# Altium PCB Controlador de velocidad - Placa fuente v2.PcbDoc
Units mil, origin at the board's own origin, x right, y up, seen from the top; angles counter-clockwise.
Board outline 3345 x 3030 mil, 2 copper layers (Top Layer, Bottom Layer); 32 components, 23 nets, 108 pads, 5 vias.
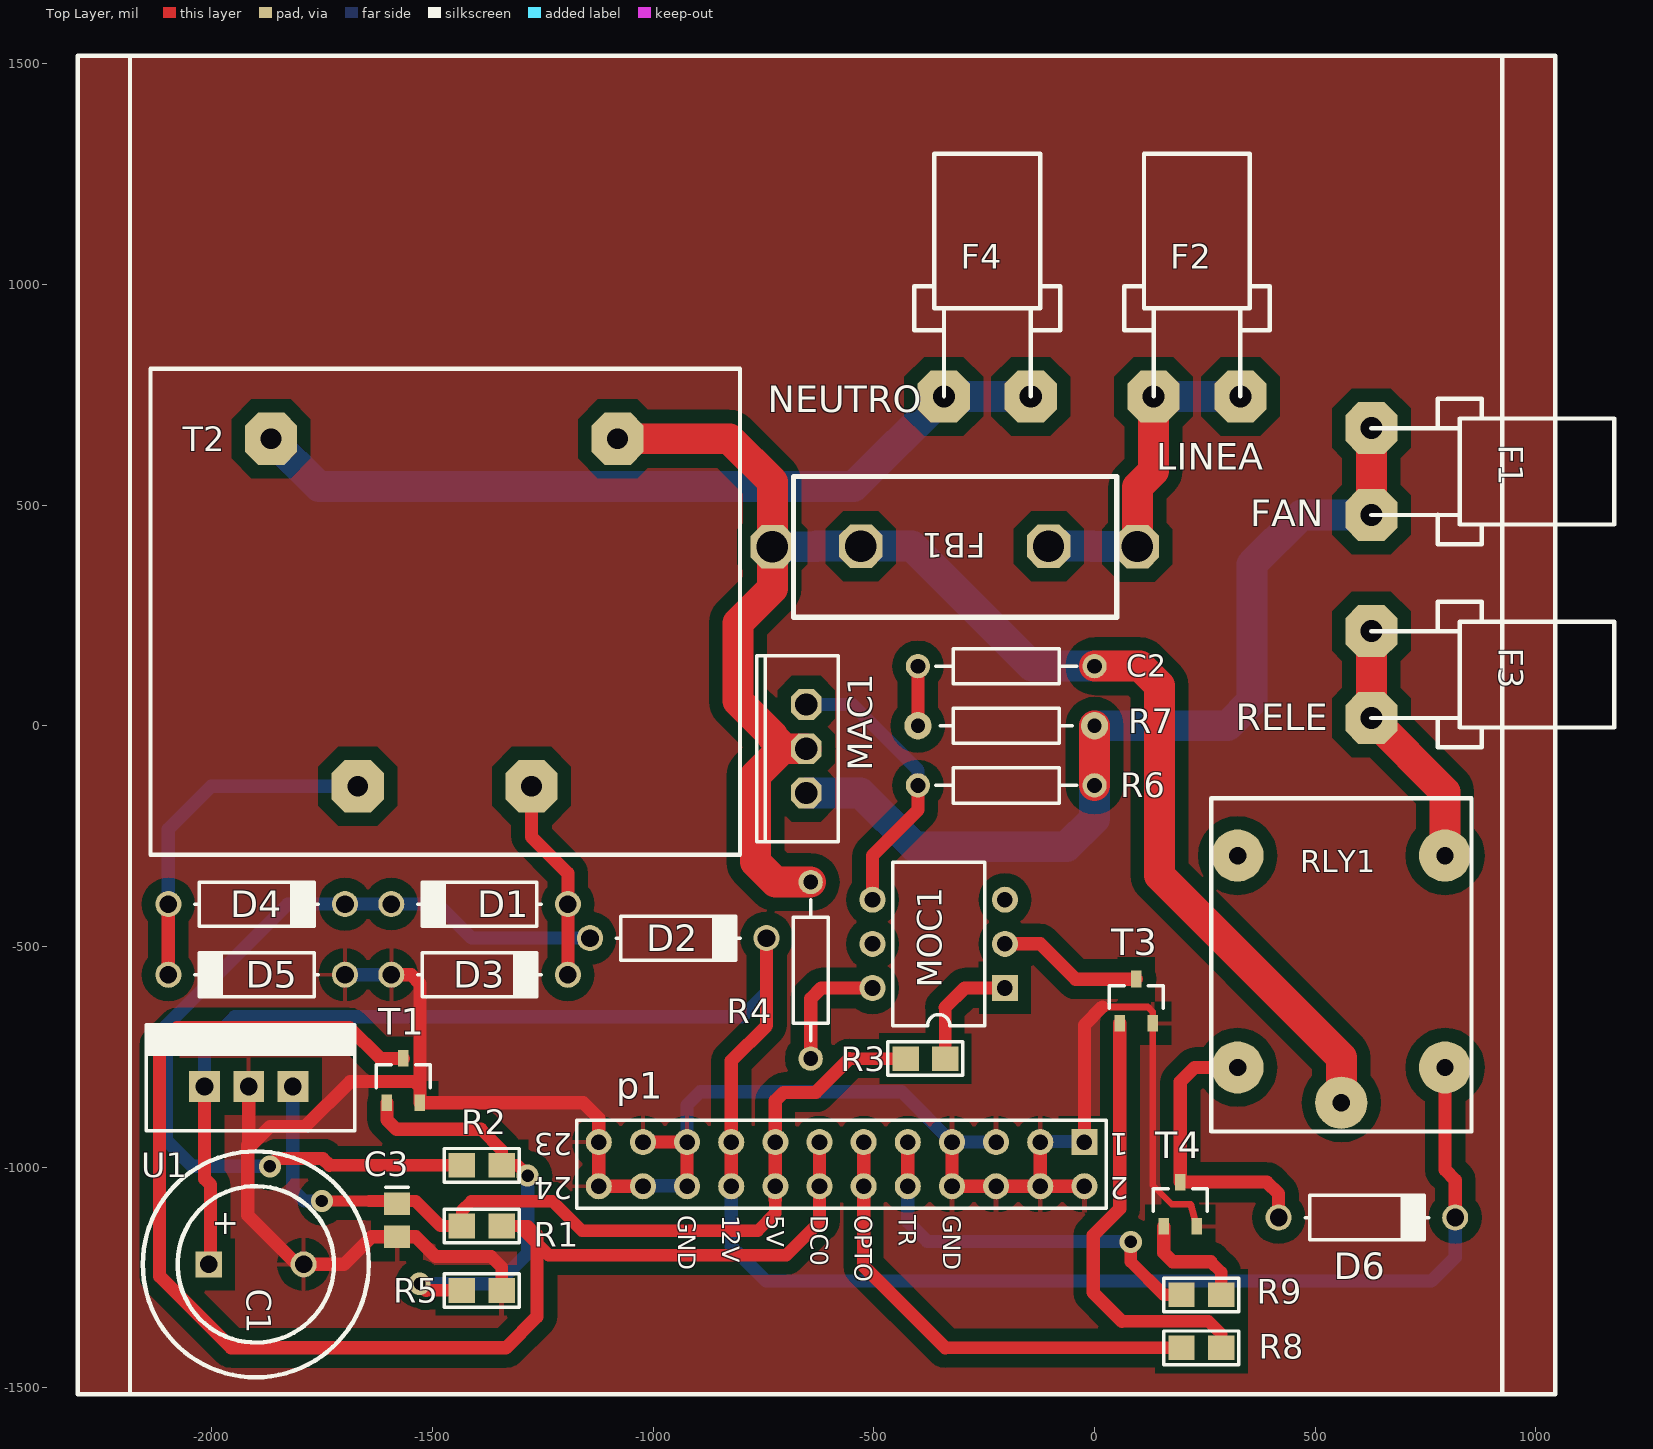
[diagram p0: Top Layer view]
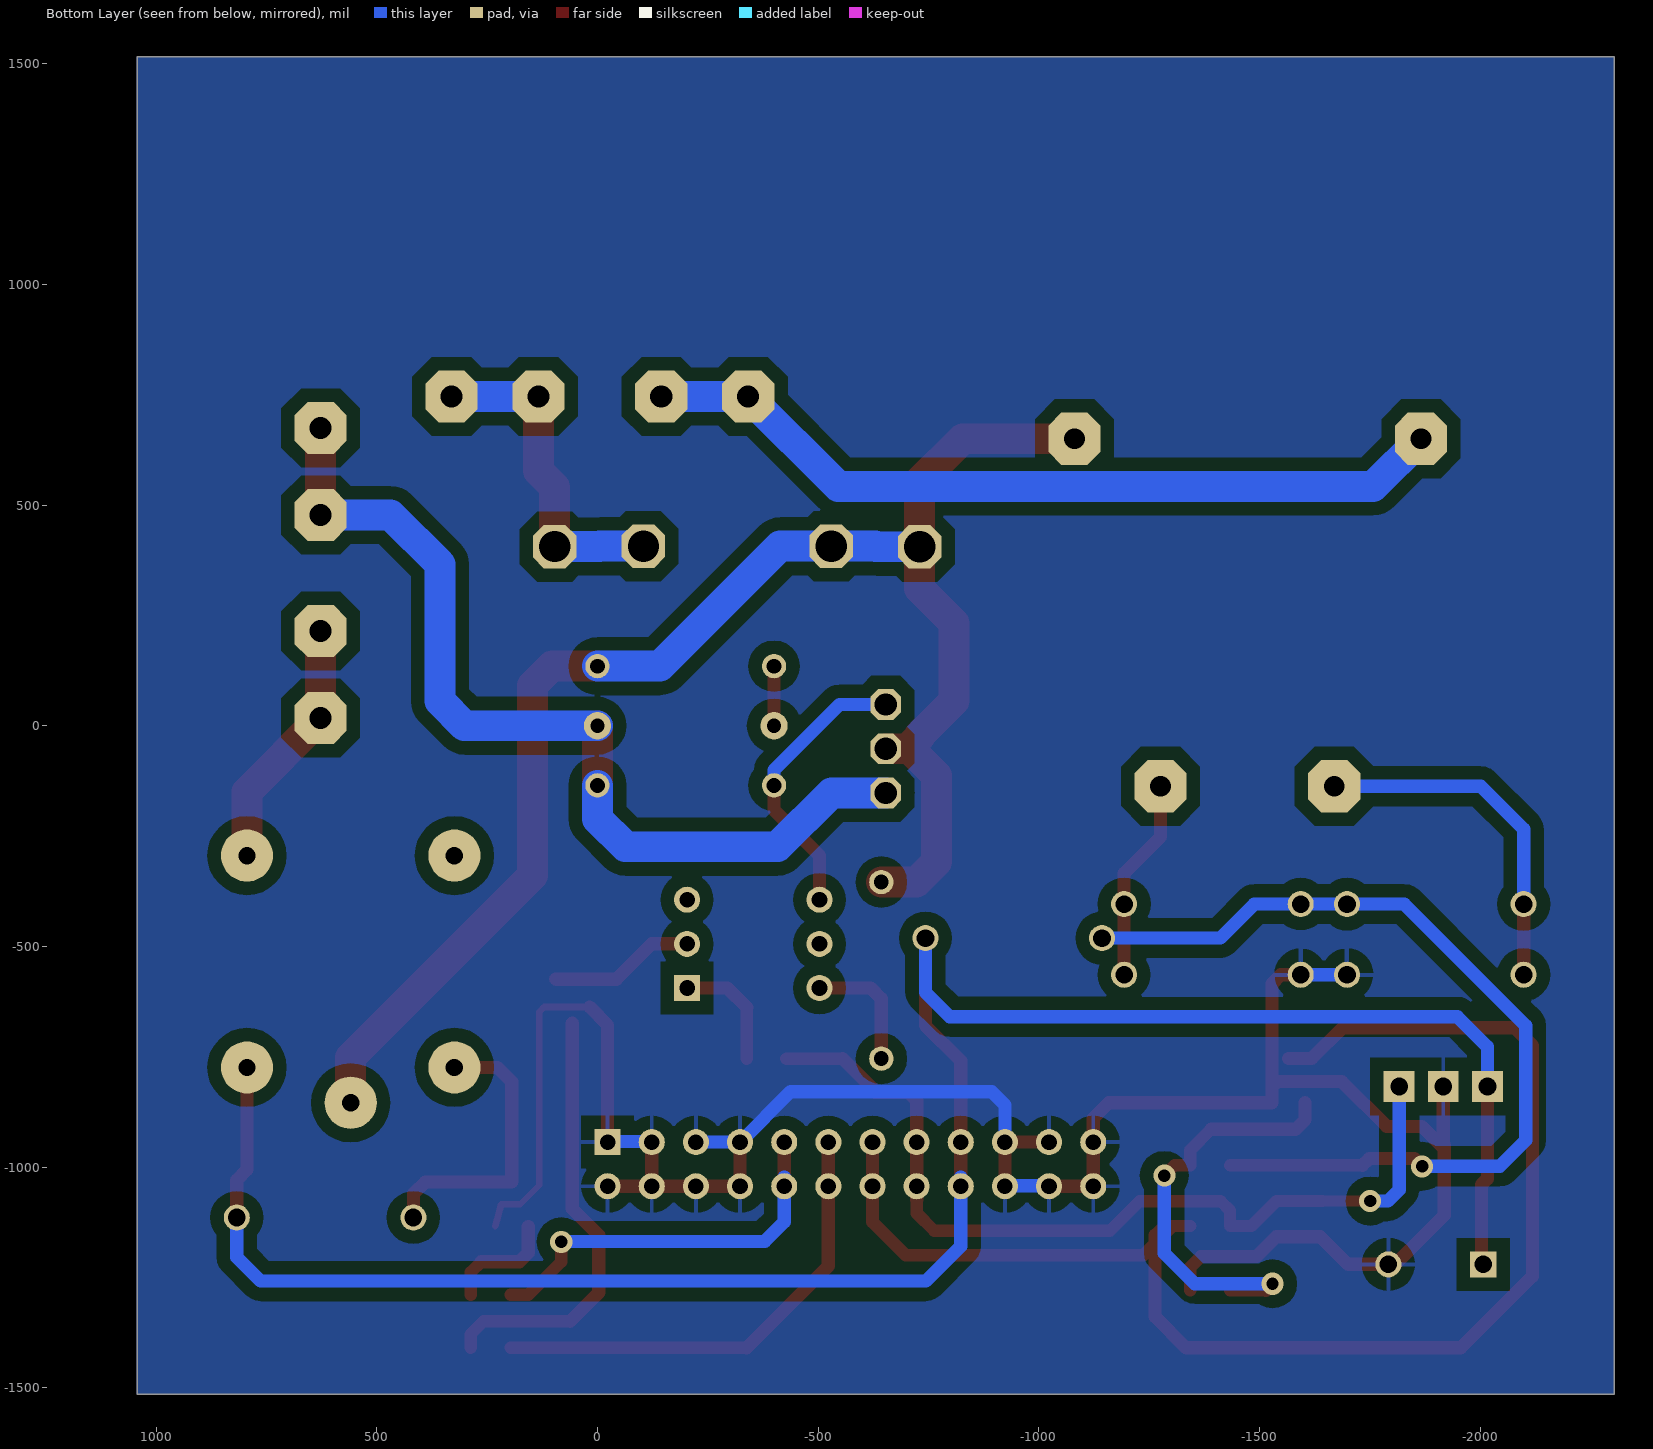
[diagram p1: Bottom Layer view, seen from below]
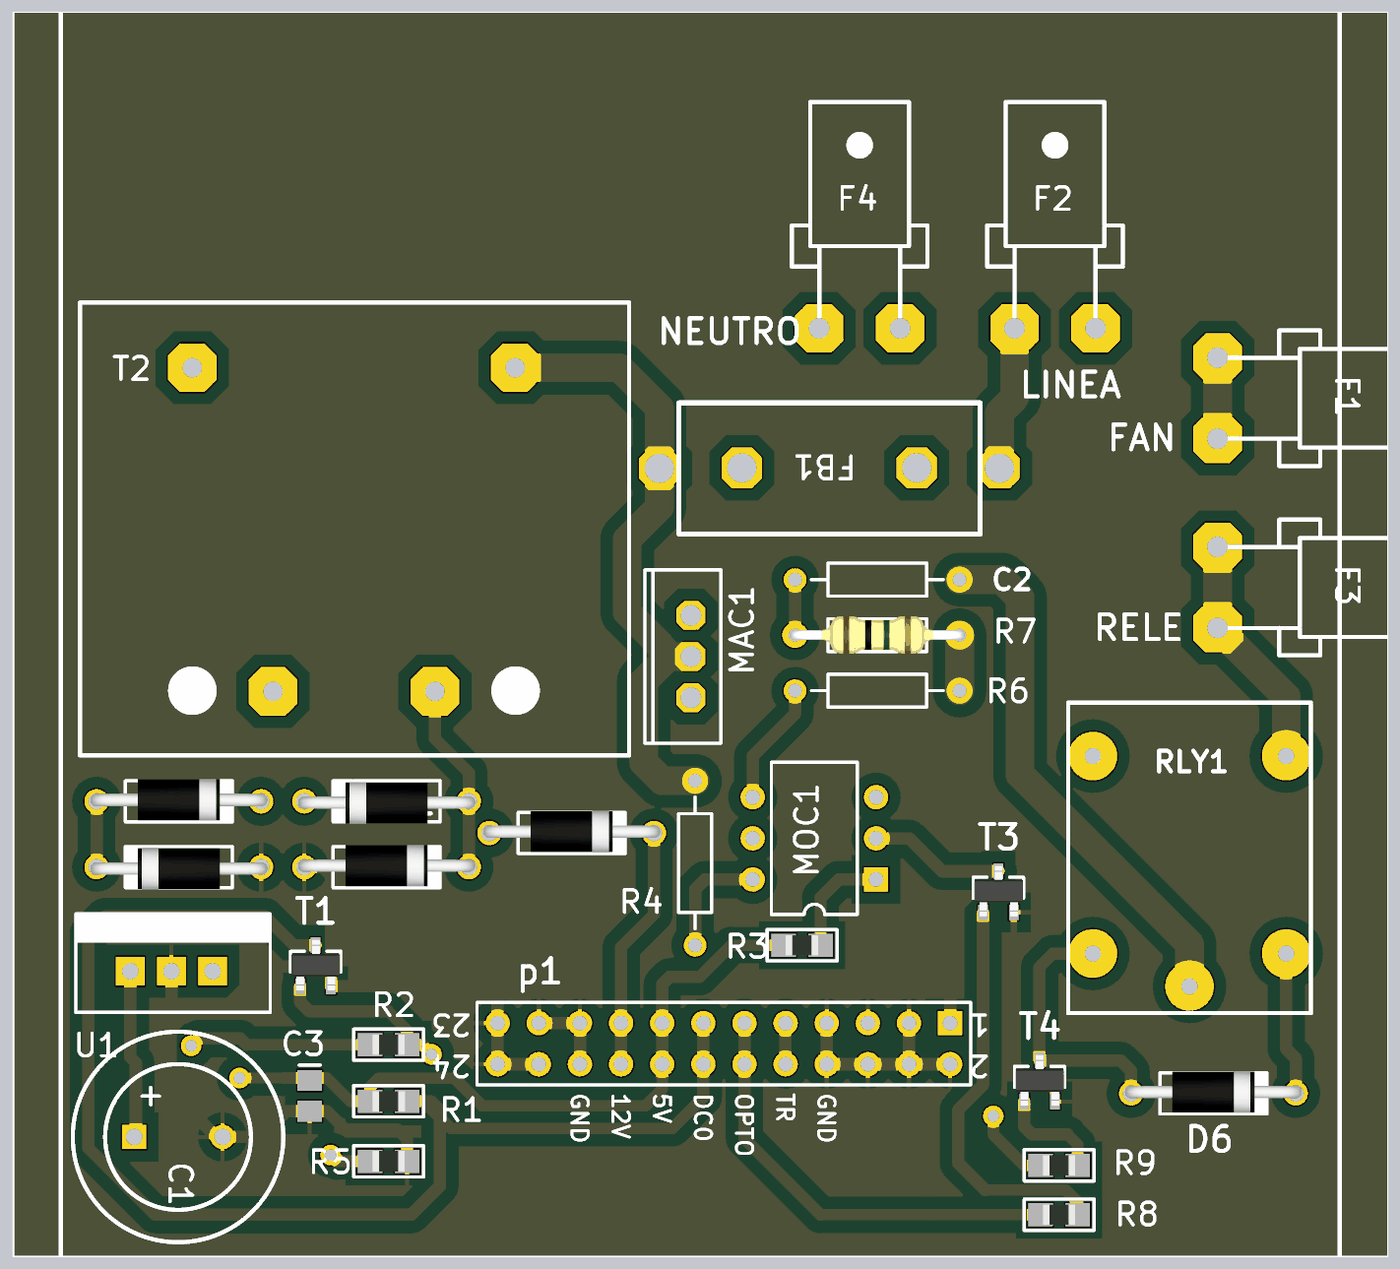
[diagram p2: 3D render of the assembled board from above, using the file's embedded part models]

## Layer stack, top to bottom
Top Layer: signal copper 1.4
Dielectric: dielectric 12.6, FR-4, Dk 4.8
Bottom Layer: signal copper 1.4

## Board outline
-2303,1516 1042,1516 1042,-1514 -2303,-1514

## Design rules (kind name [scope] priority, off if disabled: settings)
Clearance GND [InPolygon] p1: gap=30
Clearance [All] p2: gap=0
PolygonConnect [All] p1: connectstyle=Relief reliefconductorwidth=10 reliefentries=4 polygonreliefangle="90 Angle"
RoutingVias [All] p1: holewidth=28 width=50 viastyle="Through Hole" minholewidth=28 minwidth=50 maxholewidth=28 maxwidth=50
SMDNeckDown [All] p1: percent=150.000
SilkscreenOverComponentPads [All] p1: minsilkscreentomaskgap=10
SolderMaskExpansion [All] p1: expansion=4
TestPointUsage [All] p1: valid=0 allowmultiple=FALSE
Testpoint [All] p1: side=15 testpointundercomponent=TRUE minsize=40 maxsize=100 preferedsize=60 minholesize=0 maxholesize=40 preferedholesize=32 testpointgrid=1 style=1023 order=0123456789
Width 220V [InNet('L', 'N', 'LF','NetF1_1', 'NetF2_1', 'COMUN')] p1: maxlimit=70 minlimit=10 preferedwidth=10 toplayer_minwidth=70 toplayer_prefwidth=70 bottomlayer_minwidth=70 bottomlayer_prefwidth=70 minimp=50.000000 maximp=50.000000 favimp=50.000000
Width [All] p2: maxlimit=30 minlimit=10 preferedwidth=10 toplayer_minwidth=15 toplayer_prefwidth=30 bottomlayer_minwidth=30 bottomlayer_prefwidth=30 minimp=50.000000 maximp=50.000000 favimp=50.000000
23 further rules are at their usual default settings.

## Components (designator, comment, footprint, x,y, rotation, side; value= is the part's Value field where it differs from the comment)
C1 "1000uF/25V" CAP300RP -1900,-1220 r0 top
C2 "0.01u" AXIAL-0.4 -200,135 r180 top
C3 "100N" C0805 -1580,-1120 r270 top
D1 "1N4007" DO41 -1393,-403.94 r180 top
D2 "1N4007" DO41 -943,-481 r0 top
D3 "1N4007" DO41 -1393,-564.06 r0 top
D4 "1N4007" DO41 -1898,-404 r0 top
D5 "1N4007" DO41 -1898,-564 r180 top
D6 "1N4007" DO41 617,-1114 r0 top
F1 "Faston" Faston_V 827,576 r270 top (schematic designator F11)
F2 "L" Faston_V 232,946 r0 top (schematic designator F11)
F3 "Faston" Faston_V 827,116 r270 top (schematic designator F11)
F4 "N" Faston_V -243,946 r0 top (schematic designator F11)
FB1 "Fusible" Porta_fuse_2 97,406 r180 top
MAC1 "MAC8x" TO-220_vert -653,-152 r90 top (schematic designator MAC3)
MOC1 "MOC3023" 4N33 -203,-594 r90 top (schematic designator MOC3)
p1 "Header 12X2" HDR2X12 -23,-943.13 r180 top
R1 "10K" 0805 -1388,-1133 r180 top
R2 "10K" 0805 -1388,-995.6 r0 top
R3 "220" 0805 -383,-754 r0 top (schematic designator R5)
R4 "Res2" AXIAL-0.4 -643,-554 r90 top
R5 "10k" 0805 -1388,-1279 r0 top (schematic designator R3)
R6 "1K" AXIAL-0.4 -200,-135 r0 top (schematic designator R4)
R7 "120" RES400 -400,0 r0 top
R8 "10k" 0805 242,-1409 r0 top (schematic designator R5)
R9 "1k" 0805 242,-1289 r0 top (schematic designator R3)
RLY1 "IZUMI" "Relay NT73-2" 794,-774 r90 top
T1 "BC817" SOT23 -1603,-854 r0 top
T2 "UC30D-2-120018" Trafo_220_12_1 -803,808 r180 top (schematic designator T1)
T3 "BC817" SOT23 57,-674 r0 top
T4 "BC817" SOT23 157,-1134 r0 top
U1 "7805" "TO-220 V" -1916,-817 r0 top

## Footprints (in the part's own frame and the unit in brackets; to place one, negate y for a bottom-side part, rotate by r counter-clockwise, add the part's x,y. Pads: shape width x height; smd on the part's side, far side on the other; paste and mask are expansions set on the pad)
4N33 [mm]
  rect 1.5x1.5 hole 0.9: 1(0,0)
  round 1.5 hole 0.9: 2(2.54,0) 3(5.08,0) 4(5.08,7.62) 5(2.54,7.62) 6(0,7.62)
  silkscreen extent -2.16,1.16 7.24,6.46
0805 [mil] "Pasivo 0805"
  rect 60x56 smd: 1(-45,0) 2(45,0)
  silkscreen extent -85,-38 85,38, body extent -40,-25 39,25, height 15
AXIAL-0.4 [mm] "Resistor; 2 Leads"
  round 1.4 hole 0.85: 1(-5.08,0) 2(5.08,0)
  silkscreen extent -4.06,-1.02 4.06,1.02
C0805 [mm] "Chip Capacitor; Body 2.0 x 1.2 mm (LxW typ)"
  rect 1.3x1.5 smd: 1(-0.95,0) 2(0.95,0)
  silkscreen extent -1.9,-0.65 -1.9,0.65
CAP300RP [mm]
  rect 1.5x1.5 hole 1.016: 1(-2.705,0)
  round 1.5 hole 1.016: 2(2.755,0)
  silkscreen extent -4.5,-4.5 4.5,4.5
DO41 [mm]
  round 1.5 hole 1.016: 1(-5.08,0) 2(5.08,0)
  silkscreen extent -3.56,-1.27 3.56,1.27, body extent -5.46,-1.19 5.46,1.37, height 2.03
Faston_V [mm]
  round 1.651 on Top Overlay: 0(0,6.223)
  oct 3x3 hole 1.27: 1(-2.501,-5.08) 2(2.501,-5.08)
  silkscreen extent -4.19,-5.08 4.19,8.89
HDR2X12 [mm] "Connector; Header; 12x2 Position"
  rect 1.5x1.5 hole 0.9: 1(0,0)
  round 1.5 hole 0.9: 2(0,2.54) 3(2.54,0) 4(2.54,2.54) 5(5.08,0) 6(5.08,2.54) 7(7.62,0) 8(7.62,2.54) 9(10.16,0) 10(10.16,2.54) 11(12.7,0) 12(12.7,2.54) 13(15.24,0) 14(15.24,2.54) 15(17.78,0) 16(17.78,2.54) 17(20.32,0) 18(20.32,2.54) 19(22.86,0) 20(22.86,2.54) 21(25.4,0) 22(25.4,2.54) 23(27.94,0) 24(27.94,2.54)
  silkscreen extent -1.27,-1.27 29.21,3.81
Porta_fuse_2 [mm] "10"
  oct 2.5x2.5 hole 1.8: 1(0.003,0.002) 2(21.003,0.012) 3(15.91,-0.02) 4(5.11,-0.02)
  silkscreen extent 1.19,-4.03 19.79,4.07
"Relay NT73-2" [mm]
  round 3 hole 1: 1(-2.032,5.969) 2(12.192,11.938) 3(12.192,0) 4(0,11.938) 5(0,0)
  silkscreen extent -3.68,-1.52 15.49,13.46
RES400 [mil]
  round 62 hole 32: 1(0,0) 2(400,0)
  silkscreen extent 50,-40 350,40, body extent -12,-45 412,46, height 96
SOT23 [mm]
  rect 0.6x0.95 smd: 1(0,0) 2(0.95,2.55) 3(1.9,0)
  silkscreen extent -0.6,0.87 2.5,2.18, body extent -0.53,-0.25 2.47,2.88, height 1
"TO-220 V" [mil]
  rect 70x70 hole 40: 1(-100,0) 2(0,0) 3(100,0)
  silkscreen extent -232,-100 240,139, body extent -197,-79 197,118, height 709
TO-220_vert [mil]
  oct 70x70 hole 50: 1(0,0) 2(100,0) 3(200,0)
  silkscreen extent -111,-73 311,112
Trafo_220_12_1 [mm]
  oct 3x3 hole 1.2: 1(26.98,4.01) 5(7.045,4.01) 7(12,24) 9(22,24)
  round 3 on Top Overlay: 6(7.02,23.95) 10(26.98,23.95)
  silkscreen extent 0.01,-0.02 33.92,27.95

## Part data
C1: library part CAPPOL
C2: library part CAP_MINI_NPOL
C3: library part CAP
D1 D2 D3 D4 D5 D6: library part DIODO
F1 F2 F3 F4: library part FastonX1
FB1: library part Porta_fuse_1
p1: "Header, 12-Pin, Dual row"
R1 R2 R3 R4 R5 R6 R7 R8 R9: library part RES
RLY1: library part RELE_SPSP
T1 T3 T4: library part "TRANSISTOR NPN"
T2: library part TRAFO_220_12_1
U1: library part 78XX, "REGULDOR POSITIVO"

## Via types
v1: diameter 50, hole 28, Top Layer to Bottom Layer, 5 vias

## Nets (pads, with @x,y where several pads share a name; then routed paths per layer and width w, separated by ;. In a path a pad name is that pad's centre, name@x,y a point inside that pad or via, vN(x,y) a via of type N, cw(c..) or ccw(c..) an arc to the next point about the centre after c; other vN are vias at no path point)
5V: C3.1 p1.15 p1.16 R1.2 R3.1 U1.3 | length 2038.3
  Top Layer w25.59: v1(-1750.4,-1076.6) -1643,-1076.6
  Top Layer w28: -1643,-1076.6 -1538,-1076.6 -1481.6,-1133 R1.2 -1433,-1098 -1412,-1077 -1228,-1077 -1161,-1144 -763,-1144 -723,-1104 -723,-1074 ; -555.13,-754 R3.1
  Top Layer w30: -723,-1074 p1.16 -723,-1021.87 -723,-921.87 -723,-849 -704.44,-830.44 -631.56,-830.44 -555.13,-754
  Bottom Layer w30: U1.3 -1816,-1051 -1790.4,-1076.6 v1(-1750.4,-1076.6)
12V: C1.1 D2.2 D6.2 p1.17 p1.18 RLY1.5 U1.1 | length 4811.3
  Top Layer w30: U1.1 -2016,-1026 -2002.48,-1039.52 C1.1@-2002.48,-1220 ; p1.18@-823,-1021.87 -823,-759 -743,-679 D2.2 ; RLY1.5 794,-1006 817,-1029 D6.2
  Bottom Layer w30: U1.1 -2016,-727 -1948,-659 -798,-659 -743,-604 D2.2 ; p1.18@-823,-1021.87 -823,-1179 -744,-1258 763,-1258 817,-1204 D6.2
COMUN: C2.1 FB1.2 FB1.3 MAC1.2 R4.2 RLY1.1 T2.5 | length 3675.3
  Top Layer w70: T2.5 -827.13,650.13 -729.88,552.88 -729.88,311 -808,232.88 -808,56 -729.88,-22.12 -729.88,-25.12 -703,-52 ; MAC1.2 -703,-52 ; R4.2 -723,-354 -768,-309 -768,-113 -707,-52 -703,-52 ; C2.1 103,135 147,91 147,-339 559,-751 RLY1.1
  Bottom Layer w70: FB1.2 -631,405.52 -629.73,406.79 -413.79,406.79 -142,135 C2.1
DC0: p1.13 p1.14 R1.1 T1.2 | length 3304.9
  Top Layer w28: -1263,-1154 -1284,-1133 R1.1 -1303,-1133 -1237,-1199 -698,-1199 -623,-1124
  Top Layer w30: T1.2 -1618.39,-753.61 -1688,-684 -2078,-684 -2118,-724 -2118,-1247 -1956,-1409 -1333,-1409 -1263,-1339 -1263,-1154 ; -623,-1124 p1.13
GND: C1.2 C3.2 D3.1 D5.1 p1.1 p1.2 p1.3 p1.4 p1.5 p1.6 p1.7 p1.8 p1.19 p1.20 p1.21 p1.22 p1.23 p1.24 R5.2 T1.3 T3.3 T4.3 U1.2 | length 5324.1
  Top Layer w15: 18,-637 120.8,-637 131.8,-648 T3.3 131.8,-1040.8 175,-1084 217.8,-1084 T4.3
  Top Layer w28: -1367,-1202 -1343,-1226 R5.2
  Top Layer w30: -1918,-1026.52 -1918,-958 ; U1.2 -1916,-948 -1918,-950 -1918,-958 ; C1.2@-1807,-1220 -1918,-1109 -1918,-958 ; C1.2 -1700,-1220 -1637.4,-1157.4 C3.2 -1537.6,-1157.4 -1493,-1202 -1367,-1202 ; D3.1 -1547.94,-564.06 -1528.2,-583.8 -1528.2,-818 ; p1.22 p1.24 p1.23 -1123,-889 -1158,-854 T1.3 -1528.2,-818 ; p1.21 p1.19 p1.20@-923,-1021.87 ; p1.8 p1.6 p1.4 ; p1.8@-323,-1021.87 p1.7 ; p1.3 p1.4 ; p1.2 p1.4 ; p1.1 -23,-678 18,-637 ; -1918,-958 -1867.5,-907.5 -1787.5,-907.5 -1686,-806 -1540.2,-806 -1528.2,-818
  Bottom Layer w30: D5.1 -1646,-564 -1645.94,-564.06 D3.1 ; p1.22@-1023,-1041.87 p1.20@-923,-1041.87 ; p1.19 -923,-859 -893,-829 -437.13,-829 p1.7 p1.5@-244.26,-943.13 ; p1.3@-123,-941.87 p1.1@-23,-941.87
LF: F3.1 F3.2 RLY1.3 | length 577.6
  Top Layer w70: F3.1 F3.2 794,-149.46 RLY1.3
N: F4.1 F4.2 T2.1 | length 1850
  Bottom Layer w70: T2.1 -1757.08,542 -545.46,542 F4.1 F4.2
NetC2_2: C2.2 R7.1 | length 135
  Top Layer w30: R7.1 C2.2
NetD1_1: D1.1 D3.2 T2.7 | length 461.3
  Top Layer w30: T2.7 -1275.44,-251.56 -1193,-334 D3.2
NetD1_2: D1.2 D2.1 D4.2 R2.1 | length 2073.8
  Top Layer w28: -1732.9,-995.6 R2.1
  Top Layer w30: v1(-1868,-998) -1850.5,-980.5 -1748,-980.5 -1732.9,-995.6
  Bottom Layer w30: v1(-1868,-998) -2044,-998 -2103,-939 -2103,-679 -1828,-404 D4.2 -1646,-404 -1645.94,-403.94 -1488.06,-403.94 -1411,-481 D2.1
NetD4_1: D4.1 D5.2 T2.9 | length 799.1
  Top Layer w30: D5.2 D4.1
  Bottom Layer w30: D4.1 -2098,-234 -2000.88,-136.88 T2.9
NetD6_1: D6.1 RLY1.4 T4.2 | length 664
  Top Layer w11.81: T4.2@194.4,-1040 T4.2
  Top Layer w30: RLY1.4 227,-774 194.4,-806.6 T4.2 390.61,-1033.61 417,-1060 D6.1
NetF1_1: F1.1 F1.2 MAC1.1 R6.2 R7.2 | length 2144
  Top Layer w70: R6.2 R7.2 ; F1.2 F1.1
  Bottom Layer w70: MAC1.1 -530,-152 -408,-274 -63,-274 0,-211 R6.2 ; R7.2 301,0 357,56 357,366 468.54,477.54 F1.2
NetF2_1: F2.1 F2.2 FB1.1 FB1.4 | length 753.6
  Top Layer w70: FB1.1 96.89,540.89 133.54,577.54 F2.1
  Bottom Layer w70: FB1.4 -5,406.79 -4.13,405.91 FB1.1 ; F2.1 F2.2
NetMAC1_3: MAC1.3 MOC1.4 R6.1 | length 651
  Top Layer w30: MOC1.4 -503,-294 -400,-191 R6.1
  Bottom Layer w30: MAC1.3 -548,48 -400,-100 R6.1
NetMOC1_1: MOC1.1 R3.2 | length 269.2
  Top Layer w28: R3.2 -338,-638
  Top Layer w30: -338,-638 -294,-594 MOC1.1
NetMOC1_2: MOC1.2 T3.2 | length 330.7
  Top Layer w30: MOC1.2 -123,-494 -43,-574 94.01,-574 T3.2
NetMOC1_6: MOC1.6 R4.1 | length 285.9
  Top Layer w30: R4.1 -643,-618 -619,-594 MOC1.6
NetR2_2: R2.2 R5.1 T1.1 | length 982
  Top Layer w28: v1@-1514,-1279 R5.1 ; -1390,-914 -1343,-961 R2.2 -1307.4,-995.6 v1(-1284,-1019)
  Top Layer w30: T1.1 -1603,-892.5 -1581.5,-914 -1390,-914 ; v1(-1529,-1264) v1@-1514,-1279
  Bottom Layer w30: v1(-1529,-1264) -1353,-1264 -1284,-1195 v1(-1284,-1019)
NetR8_2: R8.2 T3.1 | length 994.8
  Top Layer w28: 62,-1349 258,-1349 287,-1378 R8.2
  Top Layer w30: T3.1 57,-1094 -3,-1154 -3,-1284 62,-1349
NetR9_2: R9.2 T4.1 | length 259.2
  Top Layer w28: 263,-1214 287,-1238 R9.2
  Top Layer w30: T4.1 157,-1194 177,-1214 263,-1214
OPTO: p1.11 p1.12 R8.1 | length 1077.5
  Top Layer w28: -338,-1409 R8.1
  Top Layer w30: p1.11 -523,-1224 -338,-1409
TR: p1.9 p1.10 R9.1 | length 896.2
  Top Layer w28: v1@82,-1168 82,-1214 157,-1289 R9.1
  Top Layer w30: p1.10@-423,-1021.87 p1.9
  Bottom Layer w30: p1.10@-423,-1021.87 -423,-1124 -379,-1168 v1@82,-1168
  other v1: 82,-1169
pads on no net: F1.0 F2.0 F3.0 F4.0 MOC1.3 MOC1.5 RLY1.2 T2.6 T2.10

## Polygon pours and split planes (outlines as drawn)
GND on Top Layer "Bottom Layer-No Net" (solid, remove dead copper, pour order 1000): -2303,1514.67 -2302,1516 1044,1516 1044,-1514 -2303,-1514 -2303,1514.67
GND on Bottom Layer "Bottom Layer-No Net" (solid, remove dead copper, pour order 1001): -2303,1514.67 -2302,1516 1044,1516 1044,-1514 -2303,-1514 -2303,1514.67

## Silkscreen, mask and mechanical layers (free items; w line width, h text height)
Top Overlay:
  circle w10: c-1900,-1220 r255.91
  lines w10: -2303,-1514 -2303,1517.5 1044,1517.5 1044,-1514 ; -2302.88,-1514.04 1043.57,-1514.04 ; -2184.89,-1511 -2184.89,1517.5 ; 923.89,-1514 923.89,1517.5
  text "NEUTRO" at -740,710 h60
  text "LINEA" at 140,580 h60
  text "FAN" at 353.07,451.54 h60
  text "RELE" at 320,-10 h60
  text "GND" at -942.99,-1109 h40 r270
  text "12V" at -842.99,-1109 h40 r270
  text "5V" at -742.99,-1109 h40 r270
  text "DC0" at -642.99,-1109 h40 r270
  text "OPTO" at -542.99,-1109 h40 r270
  text "TR" at -442.99,-1109 h40 r270
  text "GND" at -342.99,-1109 h40 r270

## Text inside footprints (layer, text, board x,y; h text height)
C1: Top Overlay "+" at -1945,-1160 h55 r90
p1: Top Overlay "24" at -1183,-1023.13 h50 r180; Top Overlay "23" at -1183,-923.13 h50 r180; Top Overlay "2" at 77,-1023.13 h50 r180; Top Overlay "1" at 77,-923.13 h50 r180